# EAGLE board bela_cape (EAGLE 6.6.0)
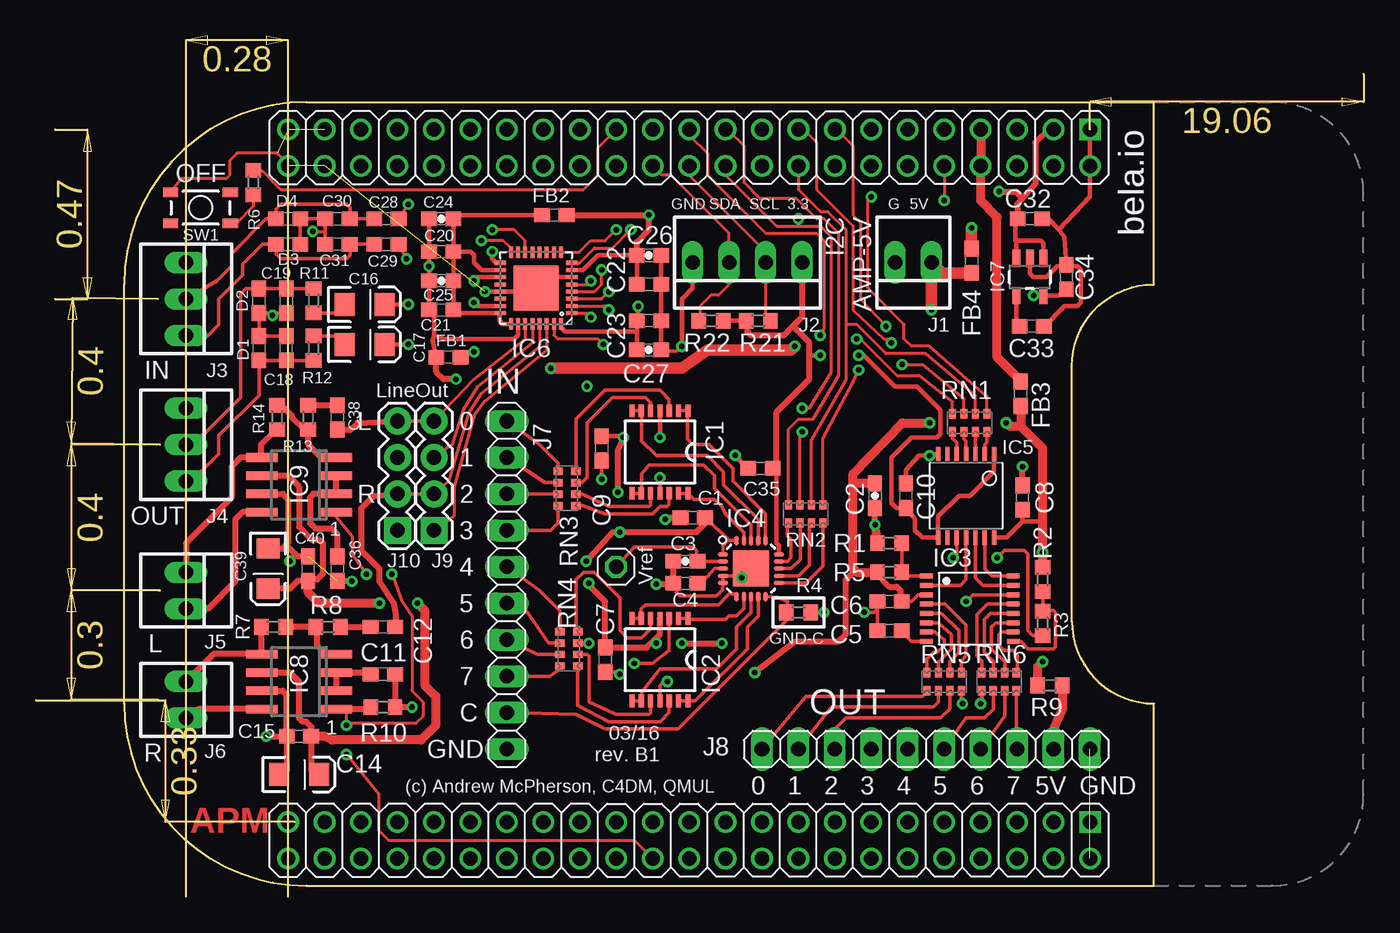
[diagram p0: board, top side]
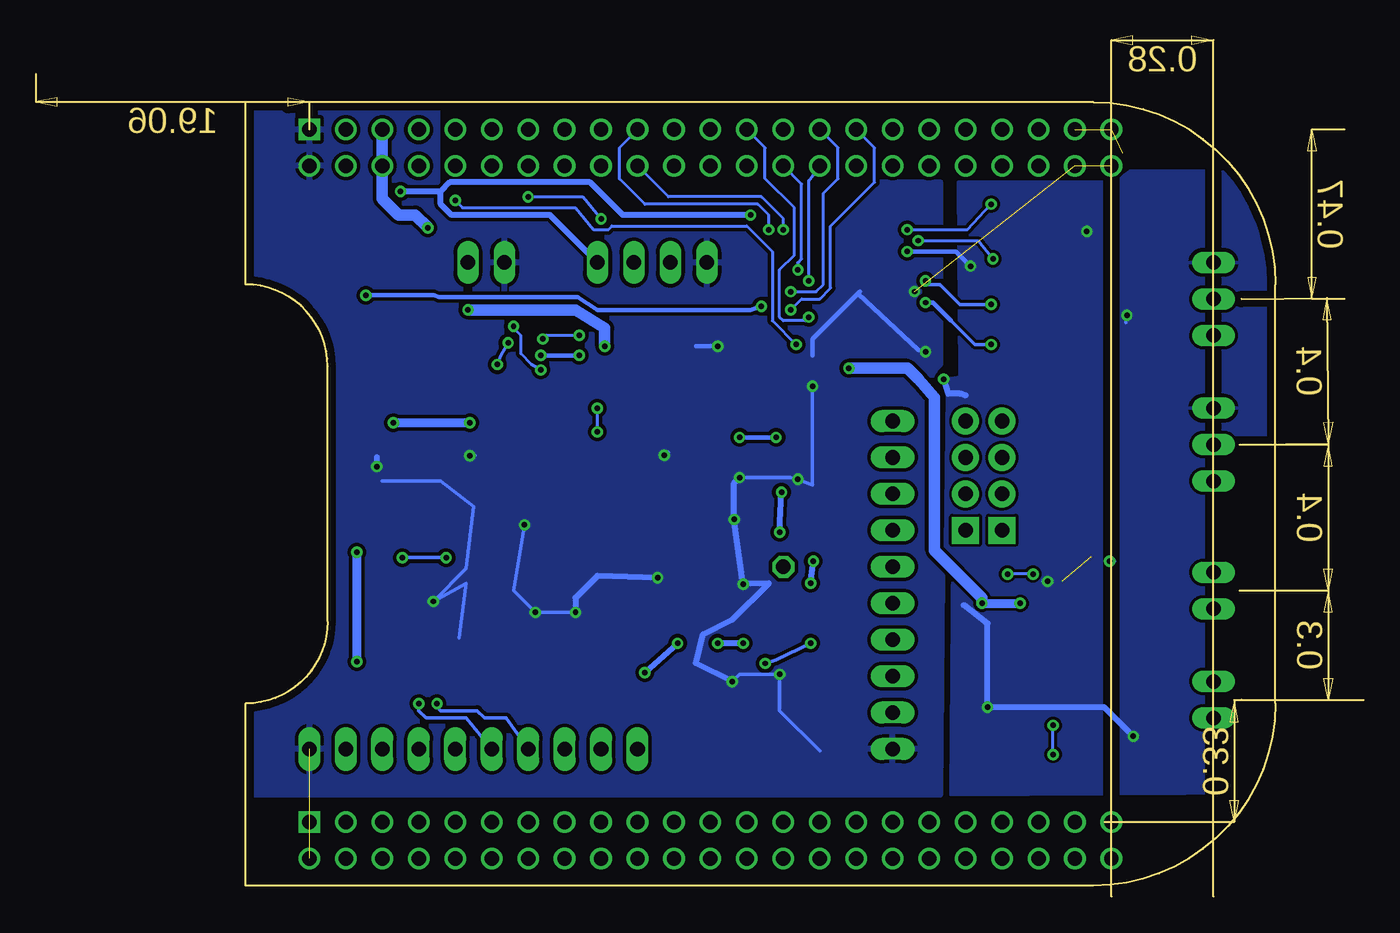
[diagram p1: board, bottom side, seen from below]

Size 71.75 x 54.61 mm. Coordinates in mm from the lower left corner, seen from the top.
Copper layers (1*16): Top 0.035mm / dielectric 1.5mm / Bottom 0.035mm
Design rules "default *": minimum track width 8mil, minimum drill 15mil, track to track 7mil, track to pad 7mil, pad to pad 7mil, via to via 7mil, smd to smd 0mil, copper to edge 20mil, drill to drill 8mil, minimum pad ring 10mil, minimum via ring 8mil, stop-mask expansion 4mil, vias tented up to drill 20mil, thermal gap 10mil

## Footprints (pad centres in the part's own frame; a part is rotated, then mirrored left to right if it is on the bottom)
C0603 = smd 1.1 x 1: 1 -0.85,0; 2 0.85,0
0603-CAP = smd 1.1 x 1: 1 -0.85,0; 2 0.85,0
EIA3216 = smd 1.4 x 1.6: A 1.4,0; C -1.4,0
0603 = smd 1.1 x 1: 1 -0.85,0; 2 0.85,0
TSSOP14 = smd 0.9 x 0.35: 1 -2.875,1.95; 2 -2.875,1.3; 3 -2.875,0.65; 4 -2.875,0; 5 -2.875,-0.65; 6 -2.875,-1.3; 7 -2.875,-1.95; 8 2.875,-1.95; 9 2.875,-1.3; 10 2.875,-0.65; 11 2.875,0; 12 2.875,0.65; 13 2.875,1.3; 14 2.875,1.95
TSSOP16-PW = smd 0.35 x 0.9: 1 -2.275,-3.025; 2 -1.625,-3.025; 3 -0.975,-3.025; 4 -0.325,-3.025; 5 0.325,-3.025; 6 0.975,-3.025; 7 1.625,-3.025; 8 2.275,-3.025; 9 2.275,3.025; 10 1.625,3.025; 11 0.975,3.025; 12 0.325,3.025; 13 -0.325,3.025; 14 -0.975,3.025; 15 -1.625,3.025; 16 -2.275,3.025
LFCSP20-LEADS = smd 0.7 x 0.3: 1 -1.95,1; 2 -1.95,0.5; 3 -1.95,0; 4 -1.95,-0.5; 5 -1.95,-1; 11 1.95,-1; 12 1.95,-0.5; 13 1.95,0; 14 1.95,0.5; 15 1.95,1 | smd 0.3 x 0.7: 6 -1,-1.95; 7 -0.5,-1.95; 8 0,-1.95; 9 0.5,-1.95; 10 1,-1.95; 16 1,1.95; 17 0.5,1.95; 18 0,1.95; 19 -0.5,1.95; 20 -1,1.95 | smd 2.5 x 2.5: EXP 0,0
TSSOP14' = smd 0.305 x 0.991: 1 -1.95,-2.918; 2 -1.3,-2.918; 3 -0.65,-2.918; 4 0,-2.918; 5 0.65,-2.918; 6 1.3,-2.918; 7 1.95,-2.918; 8 1.95,2.918; 9 1.3,2.918; 10 0.65,2.918; 11 0,2.918; 12 -0.65,2.918; 13 -1.3,2.918; 14 -1.95,2.918
QFN-32 = smd 0.285 x 0.8: 1 -1.75,-2.5; 2 -1.25,-2.5; 3 -0.75,-2.5; 4 -0.25,-2.5; 5 0.25,-2.5; 6 0.75,-2.5; 7 1.25,-2.5; 8 1.75,-2.5; 17 1.75,2.5; 18 1.25,2.5; 19 0.75,2.5; 20 0.25,2.5; 21 -0.25,2.5; 22 -0.75,2.5; 23 -1.25,2.5; 24 -1.75,2.5 | smd 0.8 x 0.285: 9 2.5,-1.75; 10 2.5,-1.25; 11 2.5,-0.75; 12 2.5,-0.25; 13 2.5,0.25; 14 2.5,0.75; 15 2.5,1.25; 16 2.5,1.75; 25 -2.5,1.75; 26 -2.5,1.25; 27 -2.5,0.75; 28 -2.5,0.25; 29 -2.5,-0.25; 30 -2.5,-0.75; 31 -2.5,-1.25; 32 -2.5,-1.75 | smd 3.15 x 3.15: EP 0,0
SOT23-5 = smd 0.55 x 1.2: 1 -0.95,-1.3; 2 0,-1.3; 3 0.95,-1.3; 4 0.95,1.3; 5 -0.95,1.3
SO8 = smd 0.6 x 2.2: 1 -1.905,-2.6; 2 -0.635,-2.6; 3 0.635,-2.6; 4 1.905,-2.6; 5 1.905,2.6; 6 0.635,2.6; 7 -0.635,2.6; 8 -1.905,2.6
22-23-2021 = drill 1 long: 1 -1.27,0; 2 1.27,0
22-23-2041 = drill 1 long: 1 -3.81,0; 2 -1.27,0; 3 1.27,0; 4 3.81,0
22-23-2031 = drill 1 long: 1 -2.54,0; 2 0,0; 3 2.54,0
1X10 = drill 1.016 long: 1 -11.43,0; 2 -8.89,0; 3 -6.35,0; 4 -3.81,0; 5 -1.27,0; 6 1.27,0; 7 3.81,0; 8 6.35,0; 9 8.89,0; 10 11.43,0
1X04 = drill 1.016 pad 1.88 square: 1 0,0 | drill 1.016 pad 1.88: 2 2.54,0; 3 5.08,0; 4 7.62,0
R0603 = smd 1 x 1.1: 1 -0.85,0; 2 0.85,0
0603-ARC = smd 0.5 x 0.65: 1 -1.2,-0.625; 2 -0.4,-0.625; 3 0.4,-0.625; 4 1.2,-0.625; 5 1.2,0.625; 6 0.4,0.625; 7 -0.4,0.625; 8 -1.2,0.625
TACTILE_SWITCH_SMD-4 = smd 1.05 x 0.65: 1 -2.075,1.075; 2 2.075,1.075; 3 -2.075,-1.075; 4 2.075,-1.075
1X01 = drill 1.016 octagon: 1 0,0
BEAGLEBONE_SHIELD = drill 1 square: 1 4.445,19.05; 47 52.705,19.05 | drill 1: 2 1.905,19.05; 3 4.445,21.59; 4 1.905,21.59; 5 4.445,24.13; 6 1.905,24.13; 7 4.445,26.67; 8 1.905,26.67; 9 4.445,29.21; 10 1.905,29.21; 11 4.445,31.75; 12 1.905,31.75; 13 4.445,34.29; 14 1.905,34.29; 15 4.445,36.83; 16 1.905,36.83; 17 4.445,39.37; 18 1.905,39.37; 19 4.445,41.91; 20 1.905,41.91; 21 4.445,44.45; 22 1.905,44.45; 23 4.445,46.99; 24 1.905,46.99; 25 4.445,49.53; 26 1.905,49.53; 27 4.445,52.07; 28 1.905,52.07; 29 4.445,54.61; 30 1.905,54.61; 31 4.445,57.15; 32 1.905,57.15; 33 4.445,59.69; 34 1.905,59.69; 35 4.445,62.23; 36 1.905,62.23; 37 4.445,64.77; 38 1.905,64.77; 39 4.445,67.31; 40 1.905,67.31; 41 4.445,69.85; 42 1.905,69.85; 43 4.445,72.39; 44 1.905,72.39; 45 4.445,74.93; 46 1.905,74.93; 48 50.165,19.05; 49 52.705,21.59; 50 50.165,21.59; 51 52.705,24.13; 52 50.165,24.13; 53 52.705,26.67; 54 50.165,26.67; 55 52.705,29.21; 56 50.165,29.21; 57 52.705,31.75; 58 50.165,31.75; 59 52.705,34.29; 60 50.165,34.29; 61 52.705,36.83; 62 50.165,36.83; 63 52.705,39.37; 64 50.165,39.37; 65 52.705,41.91; 66 50.165,41.91; 67 52.705,44.45; 68 50.165,44.45; 69 52.705,46.99; 70 50.165,46.99; 71 52.705,49.53; 72 50.165,49.53; 73 52.705,52.07; 74 50.165,52.07; 75 52.705,54.61; 76 50.165,54.61; 77 52.705,57.15; 78 50.165,57.15; 79 52.705,59.69; 80 50.165,59.69; 81 52.705,62.23; 82 50.165,62.23; 83 52.705,64.77; 84 50.165,64.77; 85 52.705,67.31; 86 50.165,67.31; 87 52.705,69.85; 88 50.165,69.85; 89 52.705,72.39; 90 50.165,72.39; 91 52.705,74.93; 92 50.165,74.93

## Placement (x,y rotation side)
C1  0.1uF  [C0603]  39.62,25.65 180 top
C2  10uF  [0603-CAP]  52.32,27.18 270 top
C3  10uF  [0603-CAP]  39.12,22.61 180 top
C4  0.1uF  [C0603]  39.12,21.08 180 top
C5  0.1uF  [C0603]  53.34,17.78 180 top
C6  0.1uF  [C0603]  53.34,19.81 180 top
C7  0.1uF  [C0603]  33.53,15.75 270 top
C8  0.1uF  [C0603]  62.61,27.05 90 top
C9  0.1uF  [C0603]  33.27,30.48 270 top
C10  0.1uF  [C0603]  54.48,27.18 90 top
C11  0.1uF  [C0603]  18.03,14.73 0 top
C12  1uF  [C0603]  18.03,18.03 180 top
C14  47uF  [EIA3216]  12.19,7.75 0 top
C15  0.1uF  [C0603]  12.19,10.41 180 top
C16  47uf  [EIA3216]  16.76,40.51 0 top
C17  47uf  [EIA3216]  16.76,37.72 0 top
C18  47pF  [C0603]  11.3,37.47 90 top
C19  47pF  [C0603]  11.3,40.77 270 top
C20  0.1uf  [C0603]  22.1,44.2 180 top
C21  0.1uf  [C0603]  22.1,40.13 180 top
C22  0.1uf  [C0603]  36.58,41.91 0 top
C23  0.1uf  [C0603]  36.58,39.37 0 top
C24  10uf,10V  [0603-CAP]  22.1,46.48 0 top
C25  10uf,10V  [0603-CAP]  22.1,42.16 0 top
C26  10uf,10V  [0603-CAP]  36.58,43.94 180 top
C27  10uf,10V  [0603-CAP]  36.58,37.34 180 top
C28  0.1uf  [C0603]  18.29,46.48 0 top
C29  0.1uf  [C0603]  18.29,44.7 180 top
C30  47pF  [C0603]  14.86,46.48 180 top
C31  47pF  [C0603]  14.86,44.7 0 top
C32  1uf  [C0603]  63.12,46.48 0 top
C33  .01uf  [C0603]  63.25,38.99 0 top
C34  2.2uf  [C0603]  65.66,42.42 90 top
C35  0.1uF  [C0603]  44.35,29.08 180 top
C36  0.1uF  [C0603]  14.86,22.1 270 top
C38  1uF  [C0603]  14.86,32.64 270 top
C39  47uF  [EIA3216]  10.03,22.1 270 top
C40  0.1uF  [C0603]  12.83,22.1 90 top
D1  PGB0010603MR  [0603]  9.4,37.47 270 top
D2  PGB0010603MR  [0603]  9.4,40.77 90 top
D3  PGB0010603MR  [0603]  11.43,44.7 180 top
D4  PGB0010603MR  [0603]  11.43,46.48 180 top
FB1  FB  [0603]  22.61,36.83 0 top
FB2  FB  [0603]  29.97,46.74 0 top
FB3  FB  [0603]  62.48,34.29 90 top
FB4  FB  [0603]  59.05,43.56 270 top
IC1  ADD8704RU  [TSSOP14]  37.34,30.23 270 top
IC2  ADD8704RU  [TSSOP14]  37.34,15.75 270 top
IC3  AD5668  [TSSOP16-PW]  58.93,19.3 270 top
IC4  AD7699  [LFCSP20-LEADS]  43.69,22.1 0 top
IC5  [TSSOP14']  58.67,27.18 180 top
IC6  TLV320AIC3104  [QFN-32]  28.7,41.66 90 top
IC7  V_REG_LDOSMD  [SOT23-5]  63.12,42.42 180 top
IC8  LM4876  [SO8]  12.19,14.22 90 top
IC9  LM4876  [SO8]  12.19,27.94 90 top
J1  22-23-2021  [22-23-2021]  54.99,43.43 180 top
J2  22-23-2041  [22-23-2041]  43.43,43.43 180 top
J3  22-23-2031  [22-23-2031]  4.32,40.89 270 top
J4  22-23-2031  [22-23-2031]  4.32,30.73 270 top
J5  22-23-2021  [22-23-2021]  4.32,20.57 270 top
J6  22-23-2021  [22-23-2021]  4.32,12.95 270 top
J7  [1X10]  26.67,20.95 270 top
J8  [1X10]  55.88,9.52 0 top
J9  [1X04]  21.59,24.77 90 top
J10  [1X04]  19.05,24.77 90 top
R1  0  [R0603]  53.34,23.88 180 top
R2  0  [R0603]  64.01,21.34 270 top
R3  DNI  [R0603]  64.01,18.29 90 top
R4  0  [R0603]  46.99,19.05 180 top
R5  DNI  [R0603]  53.34,21.84 0 top
R6  0  [R0603]  9,49 90 top
R7  22k  [R0603]  10.41,18.03 0 top
R8  22k  [R0603]  14.22,18.03 0 top
R9  100  [R0603]  64.52,13.97 180 top
R10  22k  [R0603]  18.03,12.45 0 top
R11  33  [R0603]  13.21,40.77 270 top
R12  33  [R0603]  13.21,37.47 90 top
R13  22k  [R0603]  12.83,32.64 90 top
R14  22k  [R0603]  10.67,32.64 90 top
R21  2.2k  [R0603]  44.2,39.37 180 top
R22  2.2k  [R0603]  40.89,39.37 0 top
RN1  22  [0603-ARC]  58.93,32.26 180 top
RN2  22  [0603-ARC]  47.5,25.91 0 top
RN3  220  [0603-ARC]  30.86,27.69 90 top
RN4  220  [0603-ARC]  30.99,16.51 90 top
RN5  220  [0603-ARC]  57.15,14.22 180 top
RN6  220  [0603-ARC]  60.96,14.22 180 top
S1  SWITCH-MOMENTARY-2SMD-5  [TACTILE_SWITCH_SMD-4]  5.33,47.24 180 top
TP1  [1X01]  34.29,22.23 180 top
U$1  BEAGLEBONE_OUTLINE  [BEAGLEBONE_SHIELD]  86.36,0 90 top

## Library data of the parts
C1 C4-C12 C15 C35 C36 C38 C40 R1-R10 R13 R14 R21 R22 = rcl
C2 C3 FB3 FB4 = SparkFun-Passives
C14 C39 = SparkFun-Capacitors
C16 C17 = SparkFun-Capacitors; MANEX: 123-0001196
C18 C19 C30 C31 = rcl; MANEX: 123-0001115
C20-C23 = rcl; MANEX: 123-0001056
C24-C27 = SparkFun-Passives; MANEX: 123-0001127
C28 C29 C33 = rcl; MANEX: 123-0001032
C32 = rcl; MANEX: 123-0001087
C34 = rcl; MANEX: 123-0001094
D1-D4 = CircuitCo; MANEX: 130-0001371
FB1 FB2 = SparkFun-Passives; MANEX: 126-0001418
IC1 IC2 = analog-devices; MF: ALTERA CORPORATION; MPN: ADD8704ARUZ-REEL; OC_FARNELL: unknown; OC_NEWARK: 59K0964
IC3 IC4 IC8 IC9 S1 = custom
IC5 = SparkFun-DigitalIC
IC6 = CircuitCo; MANEX: 140-0004277
IC7 = SparkFun-PowerIC; MANEX: 140-0001616
J1 J5 J6 = con-molex; MF: MOLEX; MPN: 22-23-2021; OC_FARNELL: 1462926; OC_NEWARK: 25C3832
J2 = con-molex; MF: MOLEX; MPN: 22-23-2041; OC_FARNELL: 1462920; OC_NEWARK: 38C0355
J3 J4 = con-molex; MF: MOLEX; MPN: 22-23-2031; OC_FARNELL: 1462950; OC_NEWARK: 30C0862
J7 J8 TP1 = pinhead
J9 J10 = SparkFun-Connectors; MANEX: 258-0002845
R11 R12 = rcl; MANEX: 110-0002014
RN1-RN6 = resistor-dil; OC_FARNELL: unknown; OC_NEWARK: unknown
U$1 = adafruit

## Nets
1.8V: C23.1 C27.2 C34.1 IC6.32 IC7.5
3.3V: C10.1 C22.1 C26.2 C32.1 C35.1 FB2.2 IC4.15 IC5.1 IC5.8 IC6.7 IC7.1 IC7.3 J2.1 R21.2 R22.2 U$1.49
+5V_ADC_DAC: C1.1 C2.1 C6.1 C7.1 C8.1 C9.1 FB3.1 IC1.4 IC2.4 IC3.3 IC4.1 IC4.20 IC5.14 R2.1 R5.1 R9.2
+5V_AMP: C14.A C15.1 C39.A C40.1 FB4.2 IC8.6 IC9.6 J1.1
+5V_POW: FB4.1 U$1.51 U$1.52
+5V_SYS: FB3.2 U$1.53 U$1.54
AGND: C11.2 C14.C C15.2 C18.2 C19.2 C20.2 C21.2 C24.1 C25.1 C30.2 C31.1 C36.2 C39.C C40.2 D1.1 D2.1 D3.1 D4.1 FB1.1 IC6.17 IC6.26 IC8.7 IC9.7 J3.1 J4.1 R10.2
AIN0: U$1.85
AMP_SH/: IC8.1 IC9.1 R10.1 U$1.26
AUD_3V3: C20.1 C21.1 C24.2 C25.2 FB2.1 IC6.18 IC6.24 IC6.25
AUD_BCLK: IC6.2 U$1.77
AUD_DIN: IC6.5 U$1.76
AUD_DOUT: IC6.4 U$1.74
AUD_HPLOUT: C16.A IC6.19
AUD_HPROUT: C17.A IC6.23
AUD_MCLK: IC6.1 U$1.71
AUD_WCLK: IC6.3 U$1.75
AUDIO_INL: C28.1 C30.1 D4.2 J3.2
AUDIO_INR: C29.2 C31.2 D3.2 J3.3
DGND: C1.2 C2.2 C3.2 C4.2 C5.2 C6.2 C7.2 C8.2 C9.2 C10.2 C22.2 C23.2 C26.1 C27.1 C32.2 C33.2 C34.2 C35.2 FB1.2 IC1.11 IC2.11 IC3.14 IC4.4 IC4.5 IC4.EXP IC5.7 IC6.6 IC6.21 IC6.EP IC7.2 J1.2 J2.4 J7.10 J8.10 R1.2 R4.1 S1.4 U$1.1 U$1.2 U$1.47 U$1.48 U$1.89 U$1.90 U$1.91 U$1.92
HPL: C19.1 D2.2 J4.2 R11.1
HPR: C18.1 D1.2 J4.3 R12.1
I2C1_SCL: J2.2 R21.1 U$1.70
I2C1_SDA: J2.3 R22.1 U$1.72
LEFT_LOM: IC6.28 J9.3
LEFT_LOP: IC6.27 J9.4
LEFT_LOP_RETURN: C38.2 J10.4
LINE1LP: C28.2 IC6.14
LINE1RP: C29.1 IC6.16
N$1: IC3.16 IC5.13
N$2: IC3.15 IC5.12
N$3: IC3.2 IC5.11
N$4: IC3.9 R2.2 R3.2
N$5: IC1.1 IC1.2 IC4.16
N$6: IC1.6 IC1.7 IC4.17
N$7: IC1.8 IC1.9 IC4.18
N$8: IC1.13 IC1.14 IC4.19
N$9: IC2.1 IC2.2 IC4.7
N$10: IC2.6 IC2.7 IC4.6
N$11: IC2.8 IC2.9 IC4.8
N$12: IC2.13 IC2.14 IC4.9
N$13: IC5.10 R3.1
N$14: IC4.11 RN2.4
N$15: C5.1 IC3.8
N$16: IC5.2 RN1.8
N$17: IC5.3 RN1.7
N$18: IC5.4 RN1.6
N$19: IC5.5 RN1.5
N$20: IC4.12 RN2.3
N$21: C3.1 IC4.2 TP1.1
N$22: C4.1 IC4.3
N$23: IC4.13 RN2.2
N$24: IC4.14 RN2.1
N$25: IC4.10 J7.9 R4.2
N$26: IC9.4 R13.1 R14.2
N$27: IC1.3 RN3.4
N$28: IC8.4 R7.2 R8.1
N$29: IC1.5 RN3.3
N$30: IC1.10 RN3.2
N$31: IC1.12 RN3.1
N$32: IC2.5 RN4.4
N$33: IC2.3 RN4.3
N$34: IC2.10 RN4.2
N$35: IC2.12 RN4.1
N$36: IC3.1 R1.1 R5.2
N$37: J7.1 RN3.5
N$38: J7.2 RN3.6
N$39: J7.3 RN3.7
N$40: J7.4 RN3.8
N$41: J7.5 RN4.5
N$42: J7.6 RN4.6
N$43: J7.7 RN4.7
N$44: J7.8 RN4.8
N$45: IC3.7 RN5.4
N$46: IC3.6 RN5.3
N$47: IC3.5 RN5.2
N$48: IC3.4 RN5.1
N$49: IC3.13 RN6.4
N$50: IC3.12 RN6.3
N$51: IC3.11 RN6.2
N$52: J8.8 RN6.8
N$53: C11.1 IC8.2 IC8.3
N$54: C16.C R11.2
N$55: C12.2 R8.2
N$57: IC8.5 J6.1 R7.1
N$58: R6.1 S1.1
N$59: C17.C R12.2
N$60: C36.1 IC9.2 IC9.3
N$61: J8.9 R9.1
N$63: C33.1 IC7.4
N$64: C38.1 R13.2
N$65: IC9.5 J5.1 R14.1
N$67: IC9.8 J5.2
N$71: IC8.8 J6.2
N$72: IC3.10 RN6.1
N$73: J8.7 RN6.7
N$74: J8.6 RN6.6
N$75: J8.5 RN6.5
N$76: J8.4 RN5.8
N$77: J8.3 RN5.7
N$78: J8.2 RN5.6
N$79: J8.1 RN5.5
P9_11: U$1.57
P9_13: U$1.59
RESETN: IC6.31 U$1.56
RIGHT_LOP: IC6.29 J9.2
RIGHT_LOP_RETURN: C12.1 J10.2
RIGHT_ROM: IC6.30 J9.1
SCL: IC6.8 U$1.65
SDA: IC6.9 U$1.66
SHUTDOWN_REQ/: R6.2 U$1.73
SPI_ADC_CNV: RN2.5 U$1.61
SPI_DAC_CLR/: RN1.4 U$1.69
SPI_DAC_SYNC/: RN1.3 U$1.63
SPI_MISO: RN2.8 U$1.67
SPI_MOSI: RN1.2 RN2.6 U$1.64
SPI_SCK: RN1.1 RN2.7 U$1.68
VDD_3V3EXP: U$1.50

## Tracks (layer width: path | path; a pad name or v marks a point on that pad's centre or on a via)
1.8V  (via drill 0.38)
  Top 0.305: C27.2 35.73,38.61 | 35.73,38.61 C23.1 35.81,39.46 v35.81,40.39 | IC6.32 30.45,38.89 30.73,38.61 35.73,38.61 | C34.1 65.08,41.12 IC7.5 63.91,41.12 v63.37,41.15
  Bottom 0.305: v63.37,41.15 58.67,41.15 58.29,41.02 48.64,41.02 47.24,40.13 36.58,40.13 v35.81,40.39
3.3V  (via drill 0.38)
  Top 0.305: IC6.7 31.98,42.91 33.02,43.94 C26.2 C22.1 | IC7.1 64.07,44.77 63.88,44.96 62.1,44.96 | IC7.3 62.17,44.89 62.1,44.96 | R22.2 R21.2 43.43,39.28 | IC5.1 60.62,28.87 58.93,27.18 58.17,27.18 56.72,25.74 IC5.8 55.62,24.26 55.12,24.76 55.12,25.57 C10.1 53.81,26.33 53.47,26.67 53.47,29.84 54.86,31.24 56.64,31.24 56.9,31.5 56.9,33.15 55.25,34.8 53.72,34.8 51.56,36.96 v51.18,36.96 | IC4.15 45.64,23.7 45.47,23.88 45.47,29.59 45.45,28.99 | 62.23,46.57 62.23,46.52 C32.1 62.1,46.32 62.1,44.96 | v48.51,36.96 47.88,36.96 47.75,36.83
  Top 0.406: U$1.49 64.39,52.71 63.5,51.82 63.5,48.9 62.76,48.09 | 62.76,48.09 62.61,47.92 | 62.61,47.92 62.23,47.5 62.23,46.57 | FB2.2 v36.58,46.74 36.58,45.72 35.73,44.87 C26.2 | 62.27,46.74 C32.1 | J2.1 47.24,39.62 46.61,38.99 | 46.61,38.99 45.97,38.35 43.69,38.35 43.43,38.61 43.43,39.28 | 45.47,29.59 45.47,33.02 47.75,35.31 47.75,36.83 47.75,37.85 46.61,38.99 | C35.1 45.45,28.99 | 62.61,47.92 62.61,47.93 | 62.61,47.93 62.76,48.09 | v60.96,48.39 62.15,48.39 62.61,47.93
  Bottom 0.305: v51.18,36.96 v48.51,36.96
  Bottom 0.406: v36.58,46.74 45.47,46.74 47.75,49.02 57.53,49.02 58.17,48.39 | J2.1 50.55,46.74 57.4,46.74 58.17,47.5 58.17,48.39 | 58.17,48.39 v60.96,48.39
+5V_ADC_DAC  (via drill 0.38, 0.38 pad 0.41)
  Top 0.254: C1.1 42.15,24.1 IC4.20 42.08,24.05 41.74,23.7 IC4.1 | 63.67,22.19 R2.1 | IC3.3 55.33,20.28 54.86,19.81 C6.1 54.1,19.9 | R5.1 52.49,21.68
  Top 0.305: C9.1 34.71,31.33 v34.8,31.24 | v37.34,31.24 IC1.4 | IC5.14 61.47,24.26 62.61,25.4 | 62.61,25.4 C8.1 | 62.61,25.4 63.88,25.4 64.01,25.27
  Top 0.406: 52.49,21.68 53.34,20.83 53.85,20.83 54.1,20.57 54.1,19.9 | 36.96,17.15 36.41,16.6 C7.1 33.53,19.81 32.51,20.83 v32.39,21.08 | 36.96,17.15 37.34,17.53 IC2.4 | C1.1 40.47,25.23 39.88,24.64 v34.54,24.64 34.04,24.64 v32.19,22.61 | C9.1 33.19,31.24 | 50.8,22.1 50.8,21.84 50.29,21.34 50.29,17.53 49.78,17.02 46.74,17.02 v43.94,14.86 | v38.86,16.89 v41.66,16.89 | v34.8,31.24 34.42,30.35 v34.42,27.43 | 36.96,17.15 v37.08,16.89
  Top 0.61: v56.13,32.26 54.23,32.26 50.8,28.7 50.8,28.19 | R5.1 51.05,21.84 50.8,22.1 50.8,28.19 | R2.1 64.05,22.19 v64.01,23.24 64.01,25.27 64.01,30.48 62.48,32 | R9.2 63.67,15.28 v64.01,15.62 | C2.1 50.89,28.03 50.8,28.19 | FB3.1 62.48,32 | 62.48,32 61.72,32 v61.47,32.26
  Bottom 0.305: v34.8,31.24 v37.34,31.24
  Bottom 0.406: v32.39,21.08 v32.19,22.61 | v34.54,24.64 v34.42,27.43 | v37.08,16.89 v38.86,16.89 | v41.66,16.89 v43.94,14.86
  Bottom 0.61: v56.13,32.26 v61.47,32.26 | v64.01,23.24 v64.01,15.62
+5V_AMP  (via drill 0.38)
  Top 0.406: C15.1 13.04,11.09 12.7,11.43 12.45,11.43 12.19,11.68 12.19,14.22 11.56,14.86 IC8.6 | C15.1 13.04,8.04 13.21,7.87 C14.A | 13.3,10.16 C15.1 | IC9.6 11.43,28.58 12.19,27.81 12.19,25.02 13.08,24.13 13.59,24.13 13.84,23.88 13.84,21.72 13.46,21.34 12.92,21.34 C40.1 12.1,21.25 11.56,20.7 C39.A
  Top 0.61: C15.1 13.97,10.41 14.48,10.16 20.7,10.16 21.72,11.18 21.72,13.21 20.96,13.97 20.96,19.18 v20.45,19.68 | v17.78,19.68 13.59,19.68 12.83,20.45 C40.1
  Top 0.813: v29.72,36.07 38.86,36.07 40.64,37.34 46.48,37.34 v46.74,37.59 | v56.26,40.13 J1.1 56.98,42.71 FB4.2
  Bottom 0.254: 24.89,35.31 24.89,35.56
  Bottom 0.61: v20.45,19.68 v17.78,19.68
  Bottom 0.813: v29.72,36.07 25.65,36.07 24.89,35.31 23.75,34.04 23.75,23.37 20.45,20.07 v20.45,19.68 | v46.74,37.59 46.74,38.86 48.77,40.13 v56.26,40.13
+5V_POW  (via drill 0.38)
  Top 0.813: v59.06,45.85 FB4.1
  Bottom 0.813: U$1.51 U$1.52 62.23,47.88 61.09,46.74 59.94,46.74 v59.06,45.85
+5V_SYS
  Top 0.61: U$1.53 U$1.54 59.69,47.75 60.83,46.61 60.83,36.83 62.48,35.18 FB3.2
AGND  (via drill 0.38)  (1 unrouted)
  Top 0.254: 14.01,45.55 C30.2 D4.1 D3.1 | C31.1 14.01,45.55 | 14.01,45.55 v13.14,45.59 | C18.2 D1.1 D2.1 C19.2 10.58,39.92 v10.35,39.75
  Top 0.305: IC6.26 27.45,38.37 27.18,38.1 22.35,38.1 21.59,38.35 | 21.59,38.35 21.59,40.04 C21.2 C25.1 C20.2 v21.25,43.18 C24.1 | IC6.17 25.94,43.41 25.65,43.69 v25.65,44.2 | FB1.1 21.5,38.01 21.59,38.35
  Top 0.406: FB1.1 21.76,35.81 22.26,35.31 v23.11,35.31 | C11.2 R10.2 v20.07,12.45 | C15.2 11.34,13.3 11.05,13.59 IC8.7 | C15.2 11.34,8.04 10.92,7.87 C14.C | v9.91,10.41 C15.2 | IC9.7 11.05,27.31 11.43,26.92 11.43,23.88 11.3,23.75 | C39.C 11.05,23.5 11.3,23.75 | 11.3,23.75 12.1,22.95 C40.2 11.9,22.95 v11.56,22.61 | C36.2 15.84,21.25 v15.88,21.21
  Bottom 0.254: v13.14,45.59 13.21,45.59 | v10.35,39.75 10.41,39.24
  Bottom 0.305: v25.65,44.2 22.26,44.2 v21.25,43.18
  Bottom 0.406: v9.91,10.41 11.94,12.45 v20.07,12.45 20.07,18.29 21.72,19.56 | 21.59,34.16 21.97,34.29 22.8,34.29 v23.11,35.31 | v15.88,21.21 16.13,21.21 | v11.56,22.61 11.3,22.61
  pour Bottom (isolate 0.203): 22.1,49.02 11.18,49.02 10.16,49.78 0.25,49.78 0.76,6.48 22.61,6.35 22.48,23.11 22.99,23.62 22.86,34.29 22.86,35.31 21.97,35.43
AMP_SH/  (via drill 0.38)
  Top 0.203: v15.49,9.14 17.78,6.35 17.78,3.81 18.42,3.17 35.56,3.17 U$1.26 | 15.49,12.32 v15.49,11.18 15.62,11.3 20.32,11.3 20.83,11.81 20.83,12.83 20.07,13.59 20.07,18.8 19.3,19.94 v18.67,21.72 | IC9.1 14.79,25.72 15.88,24.38 15.88,23.11 v16.89,21.72
  Top 0.406: IC8.1 15.49,12.32 17.06,12.32 R10.1
  Bottom 0.203: v15.49,9.14 v15.49,11.18 | v16.89,21.72 v18.67,21.72
AUD_3V3
  Top 0.305: FB2.1 23.46,46.74 C24.2 C20.1 | C20.1 C25.2 C21.1 23.43,39.91 IC6.24 26.16,39.87 26.16,39.37 26.38,39.16 IC6.25 | IC6.18 24.91,42.91 24.38,43.43 24.38,43.94 24.13,44.2 C20.1
AUD_BCLK  (via drill 0.38)
  Top 0.203: IC6.2 33.51,40.41 v33.78,40.13
  Bottom 0.203: v33.78,40.13 33.02,40.89 31.75,40.89 30.99,41.66 30.99,45.97 27.94,49.02 27.94,51.43 U$1.77
AUD_DIN  (via drill 0.38)
  Top 0.203: IC6.5 32.25,41.91 v32.51,42.16
  Bottom 0.203: v32.51,42.16 32.51,49.15 U$1.76
AUD_DOUT  (via drill 0.38)
  Top 0.203: IC6.4 32.77,41.41 33.27,41.91 v33.27,42.93
  Bottom 0.203: v33.27,42.93 33.27,43.43 33.02,43.69 33.02,48.9 U$1.74
AUD_HPLOUT  (via drill 0.38)
  Top 0.203: 18.67,41.02 C16.A
  Top 0.305: IC6.19 24.63,42.41 v24.38,42.16 | v19.81,40.51 C16.A
  Bottom 0.254: 24.38,41.91 23.37,41.91 21.97,40.51 v19.81,40.51
  Bottom 0.305: v24.38,42.16 24.38,41.91
AUD_HPROUT  (via drill 0.38)
  Top 0.305: IC6.23 24.62,40.41 v24.38,40.64 | v19.81,37.72 C17.A
  Bottom 0.254: 22.61,39.37 20.96,37.72 v19.81,37.72
  Bottom 0.305: v24.38,40.64 23.88,40.64 22.61,39.37
AUD_MCLK  (via drill 0.38)
  Top 0.203: IC6.1 32.23,39.91 v32.51,39.62
  Bottom 0.203: v32.51,39.62 32.77,39.37 34.29,39.37 34.54,39.62 34.54,42.93 33.53,43.94 33.53,47.24 35.56,49.28 35.56,51.43 U$1.71
AUD_WCLK  (via drill 0.38)
  Top 0.203: IC6.3 33.29,40.91 v33.78,41.4
  Bottom 0.203: v33.78,41.4 32,41.4 31.5,41.91 31.5,48.26 30.48,49.28 30.48,51.43 U$1.75
AUDIO_INL
  Top 0.254: C28.1 C30.1 15.75,46.52 15.75,47.24 15.49,47.5 10.92,47.5 10.58,47.16 D4.2 9.91,46.48 7.49,44.07 7.49,43.18 6.48,42.16 J3.2
AUDIO_INR
  Top 0.203: C29.2 17.27,44.7
  Top 0.254: C29.2 C31.2 15.75,44.66 15.75,43.94 15.49,43.69 10.92,43.69 10.58,44.03 D3.2 9.65,44.7 8.26,43.31 8.26,42.54 6.6,40.89 6.6,39.12 5.84,38.35 J3.3
DGND  (via drill 0.38, 0.38 pad 0.41)  (6 unrouted)
  Top 0.203: U$1.92 11.43,50.29 10.67,51.05 7.87,51.05 7.37,50.55 7.37,49.53 7.11,49.28 3.96,49.28 S1.4
  Top 0.254: IC4.EXP 43.19,21.6 IC4.4 IC4.5 41.68,20.6 41.28,20.19 38.74,20.19 38.48,20.45 38.48,21.04 C4.2 | 52.49,19.3 C5.2 | 52.49,19.3 C6.2 | R1.2 52.32,24.04 | IC3.14 59.14,20.28 v58.67,19.81 | v48.77,19.05 R4.1 | v51.56,19.05 52.24,19.05 52.49,19.3 | C7.2 34.38,14.9 v34.54,14.73 | v37.85,14.22 37.59,14.22 37.34,13.97 IC2.11 | v33.27,28.32 C9.2 | v37.34,28.45 IC1.11 | 37.34,37.25 38.52,37.25 v38.86,37.59 | IC5.7 56.26,30.1 v56.13,29.97
  Top 0.305: IC6.6 29.45,42.41 IC6.EP 28.45,41.41 IC6.21 v25.15,41.41 | C34.2 65.53,45.21 65.15,45.72 | 65.15,45.72 64.39,46.48 C32.2 | IC7.2 63.12,42.67 63.37,42.42 64.26,42.42 65.02,43.18 65.44,43.18 C34.2 | C33.2 64.01,38.86 65.53,40.39 66.42,40.39 66.68,40.64 66.68,42.93 66.42,43.18 65.62,43.18 C34.2 | 65.15,45.72 67.31,48.01 U$1.48 U$1.47 | C26.1 C22.2 C23.2 C27.1 37.34,37.25 | FB1.2 v24.38,37.21 | J2.4 39.62,41.66 38.86,40.89 v38.86,37.59 | C10.2 54.48,28.96 55.37,29.97 v56.13,29.97 | C35.2 43.35,29.15 v42.6,30
  Top 0.406: 52.32,24.04 C2.2 | R1.2 52.49,24.55 v52.32,25.15 | IC4.EXP v43.05,21.46 | 38.48,21.04 37.38,21.04 v37.08,21.02 | C1.2 37.85,25.65 v37.72,25.53 | C8.2 v62.61,29.21 | C3.2 C4.2
  Bottom 0.254: 56.9,17.27 56.39,21.08 v58.67,19.81 56.39,22.1 55.88,26.42 58.17,28.19 62.23,28.19 | v48.77,19.05 v51.56,19.05 53.09,20.57 v52.32,25.15 | v37.85,14.22 37.34,14.73 v34.54,14.73 34.54,12.19 31.75,9.4 | v32.26,34.8 32.26,27.94 v33.27,28.32 33.78,28.45 v37.34,28.45 | v56.13,29.97 55.75,29.97
  Bottom 0.305: 28.96,41.4 29.08,41.27 | 29.08,41.27 32.26,38.1 32.26,36.96 | v24.38,37.21 24.89,37.34 29.08,41.27 | v38.86,37.59 40.39,37.59 | v42.6,30 42.32,30.18
  Bottom 0.406: v43.05,21.46 47.24,21.59 48.77,20.07 v48.77,19.05 | v37.34,28.45 37.72,28.07 v37.72,25.53 v37.08,21.02 35.31,21.08 37.85,18.54 39.88,17.53 40.39,15.49 v37.85,14.22 | v62.61,29.21 62.61,29.84
  pour Bottom (isolate 0.254): 23.37,6.35 71.37,6.35 71.37,54.1 58.42,54.1 58.42,46.74 30.73,46.74 30.73,49.02 23.37,49.02 23.37,36.32 23.75,35.94 23.88,23.62 23.24,21.59
HPL
  Top 0.254: R11.1 C19.1 D2.2 8.47,41.62 8.13,41.27 8.13,34.04 5.59,31.5 J4.2
HPR
  Top 0.254: R12.1 C18.1 D1.2 9.4,34.16 6.6,31.37 6.6,30.1 5.46,28.96 J4.3
I2C1_SCL
  Top 0.203: U$1.70 39.37,49.53 44.7,44.2 J2.2 44.7,39.71 R21.1
I2C1_SDA
  Top 0.203: U$1.72 37.47,49.53 38.1,49.53 42.16,45.47 J2.3 42.16,41.91 41.4,41.15 40.89,41.15 40.13,40.39 40.13,39.46 R22.1
LEFT_LOM
  Top 0.203: IC6.28 28.45,37.85 24.64,34.8 23.62,33.15 22.86,30.73 J9.3
LEFT_LOP
  Top 0.203: IC6.27 27.95,38.11 24.38,35.31 J9.4
LEFT_LOP_RETURN
  Top 0.254: J10.4 21.59,32.39
  Top 0.406: C38.2 14.9,31.75 15.75,31.75 16.26,32.26 J10.4
LINE1LP  (via drill 0.38)
  Top 0.203: IC6.14 27.95,44.95 27.18,45.72 v25.65,45.72 | v19.81,47.5 C28.2
  Bottom 0.203: v25.65,45.72 21.46,45.72 v19.81,47.5
LINE1RP  (via drill 0.38)
  Top 0.203: IC6.16 26.95,44.42 26.42,44.96 v24.89,44.96 | v19.69,43.69 C29.1
  Bottom 0.203: v24.89,44.96 20.7,44.96 v19.69,43.69
N$1
  Top 0.254: IC3.16 60.46,21.58 59.97,22.07 IC5.13
N$2
  Top 0.254: IC3.15 59.84,20.93 59.32,21.45 IC5.12
N$3
  Top 0.254: IC3.2 58.27,20.93 58.67,21.34 IC5.11
N$4
  Top 0.254: R2.2 R3.2 64.05,19.18 64.77,19.18 64.9,19.05 64.9,16.64 64.77,16.51 62.99,16.51 62.47,17.03 IC3.9
N$5
  Top 0.254: IC1.2 IC1.1 39.24,33.06 39.24,31.11 39.62,30.73 40.77,30.73 42.42,29.08 42.42,28.19 44.69,25.92 IC4.16
N$6
  Top 0.254: IC4.17 44.19,25.53 41.78,27.94 41.78,28.83 40.64,29.97 37.08,29.97 36.07,30.99 36.07,33.07 IC1.6 IC1.7
N$7
  Top 0.254: IC4.18 43.69,25.15 41.15,27.69 41.15,28.58 40.39,29.34 36.58,29.34 36.07,28.7 36.07,27.38 IC1.9 IC1.8
N$8
  Top 0.254: IC4.19 43.19,24.63 41.91,25.91 41.66,26.42 41.15,26.92 39.72,26.92 IC1.14 IC1.13
N$9
  Top 0.254: IC2.2 IC2.1 | IC2.1 39.29,18.37 | IC4.7 43.19,19.31 42.67,18.8 42.16,18.8 41.91,18.54 39.37,18.54 IC2.1
N$10
  Top 0.254: IC2.7 IC2.6 36.04,19.27 36.32,19.56 41.4,19.56 42.16,20.32 42.66,20.32 IC4.6
N$11
  Top 0.254: IC4.8 43.69,19.05 42.67,18.03 42.67,16.51 41.28,15.11 37.34,15.11 36.07,13.46 36.07,12.9 IC2.9 IC2.8
N$12
  Top 0.254: IC2.13 IC2.14 39.8,12.87 43.43,16.51 43.43,18.03 44.2,18.8 44.2,20.34 IC4.9
N$13  (via drill 0.38)
  Top 0.254: R3.1 63.29,17.44 62.99,17.78 62.99,23.11 62.74,23.37 61.34,23.37 v60.83,22.86 | v57.79,22.86 58.04,23.11 58.04,24.25 IC5.10
  Bottom 0.254: v60.83,22.86 v57.79,22.86
N$14
  Top 0.254: IC4.11 47.51,21.1 48.7,22.28 RN2.4
N$15
  Top 0.254: C5.1 54.19,17.69 54.86,17.02 55.89,17.02 IC3.8
N$16
  Top 0.254: IC5.2 59.97,30.76 60.13,30.92 RN1.8
N$17
  Top 0.254: 59.25,31.56 RN1.7 IC5.3
N$18
  Top 0.254: 58.6,31.56 RN1.6 58.53,31.13 58.67,30.99 IC5.4
N$19
  Top 0.254: IC5.5 58.02,30.88 57.73,31.17 RN1.5
N$20
  Top 0.254: IC4.12 47,21.6 47.75,22.35 47.75,25.14 RN2.3
N$21
  Top 0.254: IC4.2 40.02,22.6 C3.1 39.88,22.69 39.88,23.37 39.62,23.62 35.56,23.62 TP1.1
N$22
  Top 0.254: IC4.3 41.15,22.1 40.89,21.84 40.39,21.25 C4.1
N$23
  Top 0.254: IC4.13 46.48,22.1 47.12,22.73 47.12,25.3 RN2.2
N$24
  Top 0.254: IC4.14 46.22,22.6 46.48,22.86 46.48,24.13 46.23,24.38 46.23,25.21 RN2.1
N$25
  Top 0.254: IC4.10 45.57,20.09 46.23,19.81 46.23,19.14 R4.2 46.23,18.96 46.23,18.54 38.61,10.92 33.53,10.92 31.5,11.94 J7.9
N$26
  Top 0.406: R14.2 10.96,33.49 11.68,32.77 11.68,32.64 12.53,31.79 R13.1 12.83,30.73 13.72,29.84 IC9.4
N$27
  Top 0.254: IC1.3 37.99,33.89 37.34,34.54 33.53,34.54 31.5,32.51 31.5,28.9 RN3.4
N$28
  Top 0.406: IC8.4 14.1,16.13 13.46,16.76 13.46,17.95 | R8.1 R7.2
  Top 0.61: R8.1 13.46,17.95
N$29
  Top 0.254: IC1.5 36.69,33.67 36.32,34.04 34.04,34.04 32.26,32.26 32.26,28.45 31.9,28.09 RN3.3
N$30
  Top 0.254: IC1.10 36.69,26.53 36.58,26.42 33.78,26.42 31.9,27.29 RN3.2
N$31
  Top 0.254: IC1.12 37.99,26.56 37.85,26.42 37.34,26.42 36.83,25.91 33.53,25.91 31.93,26.49 RN3.1
N$32
  Top 0.254: IC2.5 36.69,17.89 36.07,17.27 35.05,17.27 34.54,17.78 34.54,20.07 32.77,21.84 32,21.84 31.5,21.34 31.5,17.83 RN4.4
N$33  (via drill 0.38)
  Top 0.254: IC2.3 37.99,16.4 36.83,15.49 v35.56,15.49 | v32.39,16.89 31.63,16.89 RN4.3
  Bottom 0.254: v35.56,15.49 34.8,15.75 v32.39,16.89
N$34
  Top 0.254: IC2.10 36.69,12.05 36.58,11.94 34.29,11.94 32.39,12.83 32.39,16 32.26,16.13 31.63,16.13 RN4.2
N$35
  Top 0.254: IC2.12 37.99,12.08 37.34,11.43 33.78,11.43 31.61,12.58 RN4.1
N$36
  Top 0.254: IC3.1 54.46,21.58 R5.2 R1.1
N$37
  Top 0.254: RN3.5 30.24,29.45 28.96,30.73 J7.1
N$38
  Top 0.254: RN3.6 29.32,28.09 J7.2
N$39
  Top 0.254: RN3.7 27.29,27.29 J7.3
N$40
  Top 0.254: RN3.8 30.24,25.28 29.72,24.76 J7.4
N$41
  Top 0.254: RN4.5 30.36,19.17 28.96,20.57 J7.5
N$42
  Top 0.254: RN4.6 29.57,16.91 27.94,19.3 J7.6
N$43
  Top 0.254: RN4.7 28.81,16.11 J7.7
N$44
  Top 0.254: RN4.8 30.36,15.12 29.65,14.61 J7.8
N$45
  Top 0.254: IC3.7 56.49,17.68 57.15,17.15 57.15,16.76 56.64,16.26 56.39,16.26 55.95,15.82 RN5.4
N$46
  Top 0.254: IC3.6 56.73,18.33 57.66,17.53 57.66,16.51 56.75,15.6 RN5.3
N$47
  Top 0.254: IC3.5 56.97,18.98 58.17,17.78 58.17,16.26 57.55,15.64 RN5.2
N$48
  Top 0.254: IC3.4 57.21,19.63 58.67,18.16 58.67,16 58.35,15.68 RN5.1
N$49
  Top 0.254: IC3.13 60.14,19.63 59.44,18.92 59.44,16 59.76,15.68 RN6.4
N$50
  Top 0.254: IC3.12 60.38,18.98 59.94,18.54 59.94,16.26 60.56,15.64 RN6.3
N$51
  Top 0.254: IC3.11 60.75,18.33 60.45,18.03 60.45,16.51 61.36,15.6 RN6.2
N$52
  Top 0.254: RN6.8 62.16,10.34 J8.8
N$53
  Top 0.406: C11.1 17.06,14.86 IC8.3 IC8.2
N$54
  Top 0.254: R11.2 14.77,39.92 C16.C
N$55
  Top 0.406: R8.2 C12.2
N$57
  Top 0.406: R7.1 9.56,16.16 | 9.56,16.16 IC8.5 | 9.56,16.16 6.25,16.16 J6.1
N$58
  Top 0.203: R6.1 9,47.36 7.87,46.23 7.21,46.23 S1.1
N$59
  Top 0.254: R12.2 14.77,38.31 C17.C
N$60
  Top 0.406: IC9.3 IC9.2 13.21,27.31 12.95,27.05 12.95,25.27 13.34,24.89 14.48,24.89 14.86,24.51 C36.1
N$61
  Top 0.61: R9.1 65.37,12.28 64.77,10.92 J8.9
N$63
  Top 0.305: IC7.4 62.17,39.22 C33.1
N$64
  Top 0.406: R13.2 C38.1
N$65
  Top 0.406: R14.1 10.58,31.79 9.53,30.73 9.53,29.91 IC9.5 8.13,29.84 7.49,29.21 7.49,27.05 4.32,23.88 J5.1
N$67
  Top 0.406: IC9.8 8.26,26.03 7.75,25.53 7.75,21.21 5.84,19.3 J5.2
N$71
  Top 0.406: IC8.8 5.21,12.32 J6.2
N$72
  Top 0.254: IC3.10 61.11,17.68 60.96,17.53 60.96,16.76 61.34,16.38 61.98,16.38 62.23,16 62.23,14.92 RN6.1
N$73
  Top 0.254: RN6.7 61.36,11.83 J8.7
N$74
  Top 0.254: RN6.6 60.56,12.3 59.94,11.68 58.67,11.68 J8.6
N$75  (via drill 0.38)
  Top 0.254: RN6.5 59.76,12.77 v59.69,12.7
  Bottom 0.254: v59.69,12.7 59.69,12.19 59.18,11.68 56.39,11.68 J8.5
N$76  (via drill 0.38)
  Top 0.254: RN5.8 58.35,12.77 v58.42,12.7
  Bottom 0.254: v58.42,12.7 58.42,12.45 58.17,12.19 55.63,12.19 55.12,11.68 53.59,11.68 J8.4
N$77
  Top 0.254: RN5.7 57.55,12.34 56.9,11.68 50.29,11.68 49.53,10.92 J8.3
N$78
  Top 0.254: RN5.6 56.75,12.81 56.39,12.45 49.28,12.45 J8.2
N$79
  Top 0.254: RN5.5 55.95,13.53 55.63,13.21 47.5,13.21 J8.1
RESETN  (via drill 0.38)
  Top 0.203: U$1.56 v57.15,47.75 | IC6.31 29.95,38.37 30.23,38.1 33.02,38.1 v33.4,37.72
  Bottom 0.203: v57.15,47.75 56.64,47.24 48.77,47.24 47.5,45.72 46.48,45.72 46.23,45.97 36.83,45.97 35.05,44.2 35.05,39.37 v33.4,37.72
RIGHT_LOP
  Top 0.203: IC6.29 28.95,37.59 24.89,34.29 24,32.96 22.61,28.19 J9.2
RIGHT_LOP_RETURN
  Top 0.254: J10.2 21.53,27.31
  Top 0.406: C12.1 18.92,18.07 18.92,18.92 18.8,19.68 17.78,21.21 17.78,22.1 16.51,23.37 16.51,26.29 17.4,27.18 J10.2
RIGHT_ROM
  Top 0.203: IC6.30 29.45,37.33 25.15,33.78 24.38,32.77 22.99,27.81 22.99,25.78 J9.1
SCL  (via drill 0.38)
  Top 0.203: IC6.8 31.72,43.41 32.77,44.45 34.04,44.45 v35.31,45.72
  Bottom 0.203: v35.31,45.72 35.31,46.74 36.07,47.5 43.94,47.5 45.72,49.28 45.72,51.43 U$1.65
SDA  (via drill 0.38)
  Top 0.203: IC6.9 31.71,44.16 32.51,44.96 33.53,44.96 v34.29,45.72
  Bottom 0.203: v34.29,45.72 34.29,46.48 35.81,48.01 42.29,48.01 U$1.66
SHUTDOWN_REQ/
  Top 0.203: U$1.73 33.02,51.43 33.02,49.53 32,48.51 10.92,48.51 9.65,49.78 9.07,49.78 R6.2
SPI_ADC_CNV  (via drill 0.38)
  Top 0.203: RN2.5 48.7,31.17 50.8,35.05 v51.18,35.94 | U$1.61 49.66,52.71 50.8,51.56 50.8,46.74 51.31,46.23 51.31,40.89 v53.09,38.99
  Bottom 0.203: v51.18,35.94 51.82,36.32 52.58,37.08 52.58,38.35 53.09,38.86 v53.09,38.99
SPI_DAC_CLR/  (via drill 0.38)
  Top 0.203: U$1.69 39.37,52.32 40.64,51.05 40.64,49.53 44.7,45.47 48.26,45.47 48.77,44.96 48.77,38.86 v48.51,38.35 | v51.05,38.1 51.31,38.1 53.85,35.56 55.37,35.56 57.73,33.71 RN1.4
  Bottom 0.203: v48.51,38.35 50.8,38.35 v51.05,38.1
SPI_DAC_SYNC/  (via drill 0.38)
  Top 0.203: U$1.63 47.37,52.71 48.26,51.82 48.26,48.51 50.8,45.97 50.8,40.13 52.96,38.1 53.21,38.1 v53.47,37.85 | RN1.3 58.53,33.93 55.63,36.32 v54.23,36.32
  Bottom 0.203: v53.47,37.85 53.98,36.96 v54.23,36.32
SPI_MISO
  Top 0.203: RN2.8 46.3,31.82 46.99,32.51 48.01,32.51 49.78,35.56 49.78,45.47 48.77,46.48 48.26,46.48 46.86,47.88 44.32,47.88 43.18,49.02 43.18,51.56 42.04,52.71 U$1.67
SPI_MOSI
  Top 0.203: RN2.6 47.9,31.1 50.29,35.27 50.29,39.12 | U$1.64 46.99,48.51 48.51,46.99 49.02,46.99 50.29,45.72 50.29,39.12 | RN1.2 59.33,34.14 55.88,37.08 53.09,37.08 51.05,39.12 50.29,39.12
SPI_SCK  (via drill 0.38)
  Top 0.203: RN2.7 47.1,31.35 v47.24,31.62 | U$1.68 41.91,49.53 45.47,45.97 46.99,45.97 | 46.99,45.97 48.51,45.97 49.28,45.21 49.28,35.81 47.75,33.27 v47.24,33.27 | RN1.1 60.13,34.11 56.13,37.59 54.86,37.59 54.36,38.1 54.36,39.12 51.82,41.66 51.82,47.75 v52.07,48.01 | v46.99,46.48 46.99,45.97
  Bottom 0.203: v47.24,31.62 v47.24,33.27 | v52.07,48.01 48.26,48.01 v46.99,46.48

## Text on the board
Top: APM
tPlace: bela.io | GND | SDA | SCL | 3.3 | G | 5V | I2C | AMP-5V | IN | LineOut | IN | L | 0 | 1 | OUT | R | 2 | 1 | 3 | Vref | 4 | 5 | L | GND-C | 6 | 7 | OUT | 1 | C | 03/16 / rev. B1 | R | GND | (c) Andrew McPherson, C4DM, QMUL | 0 | 1 | 2 | 3 | 4 | 5 | 6 | 7 | 5V | GND
tNames: OFF | SW1